# Altium PCB vp40_base_board.PcbDoc (part 3 of 5)
Units mil, origin at the board's own origin, x right, y up, seen from the top; angles counter-clockwise.
Board outline 8267.72 x 4330.71 mil, 4 copper layers (Top Layer, Internal Plane 1, Internal Plane 2, Bottom Layer), stack 30.635 mil thick; 531 components, 391 nets, 1969 pads, 1352 vias.
Unrouted connection lines stored in the file: 302.
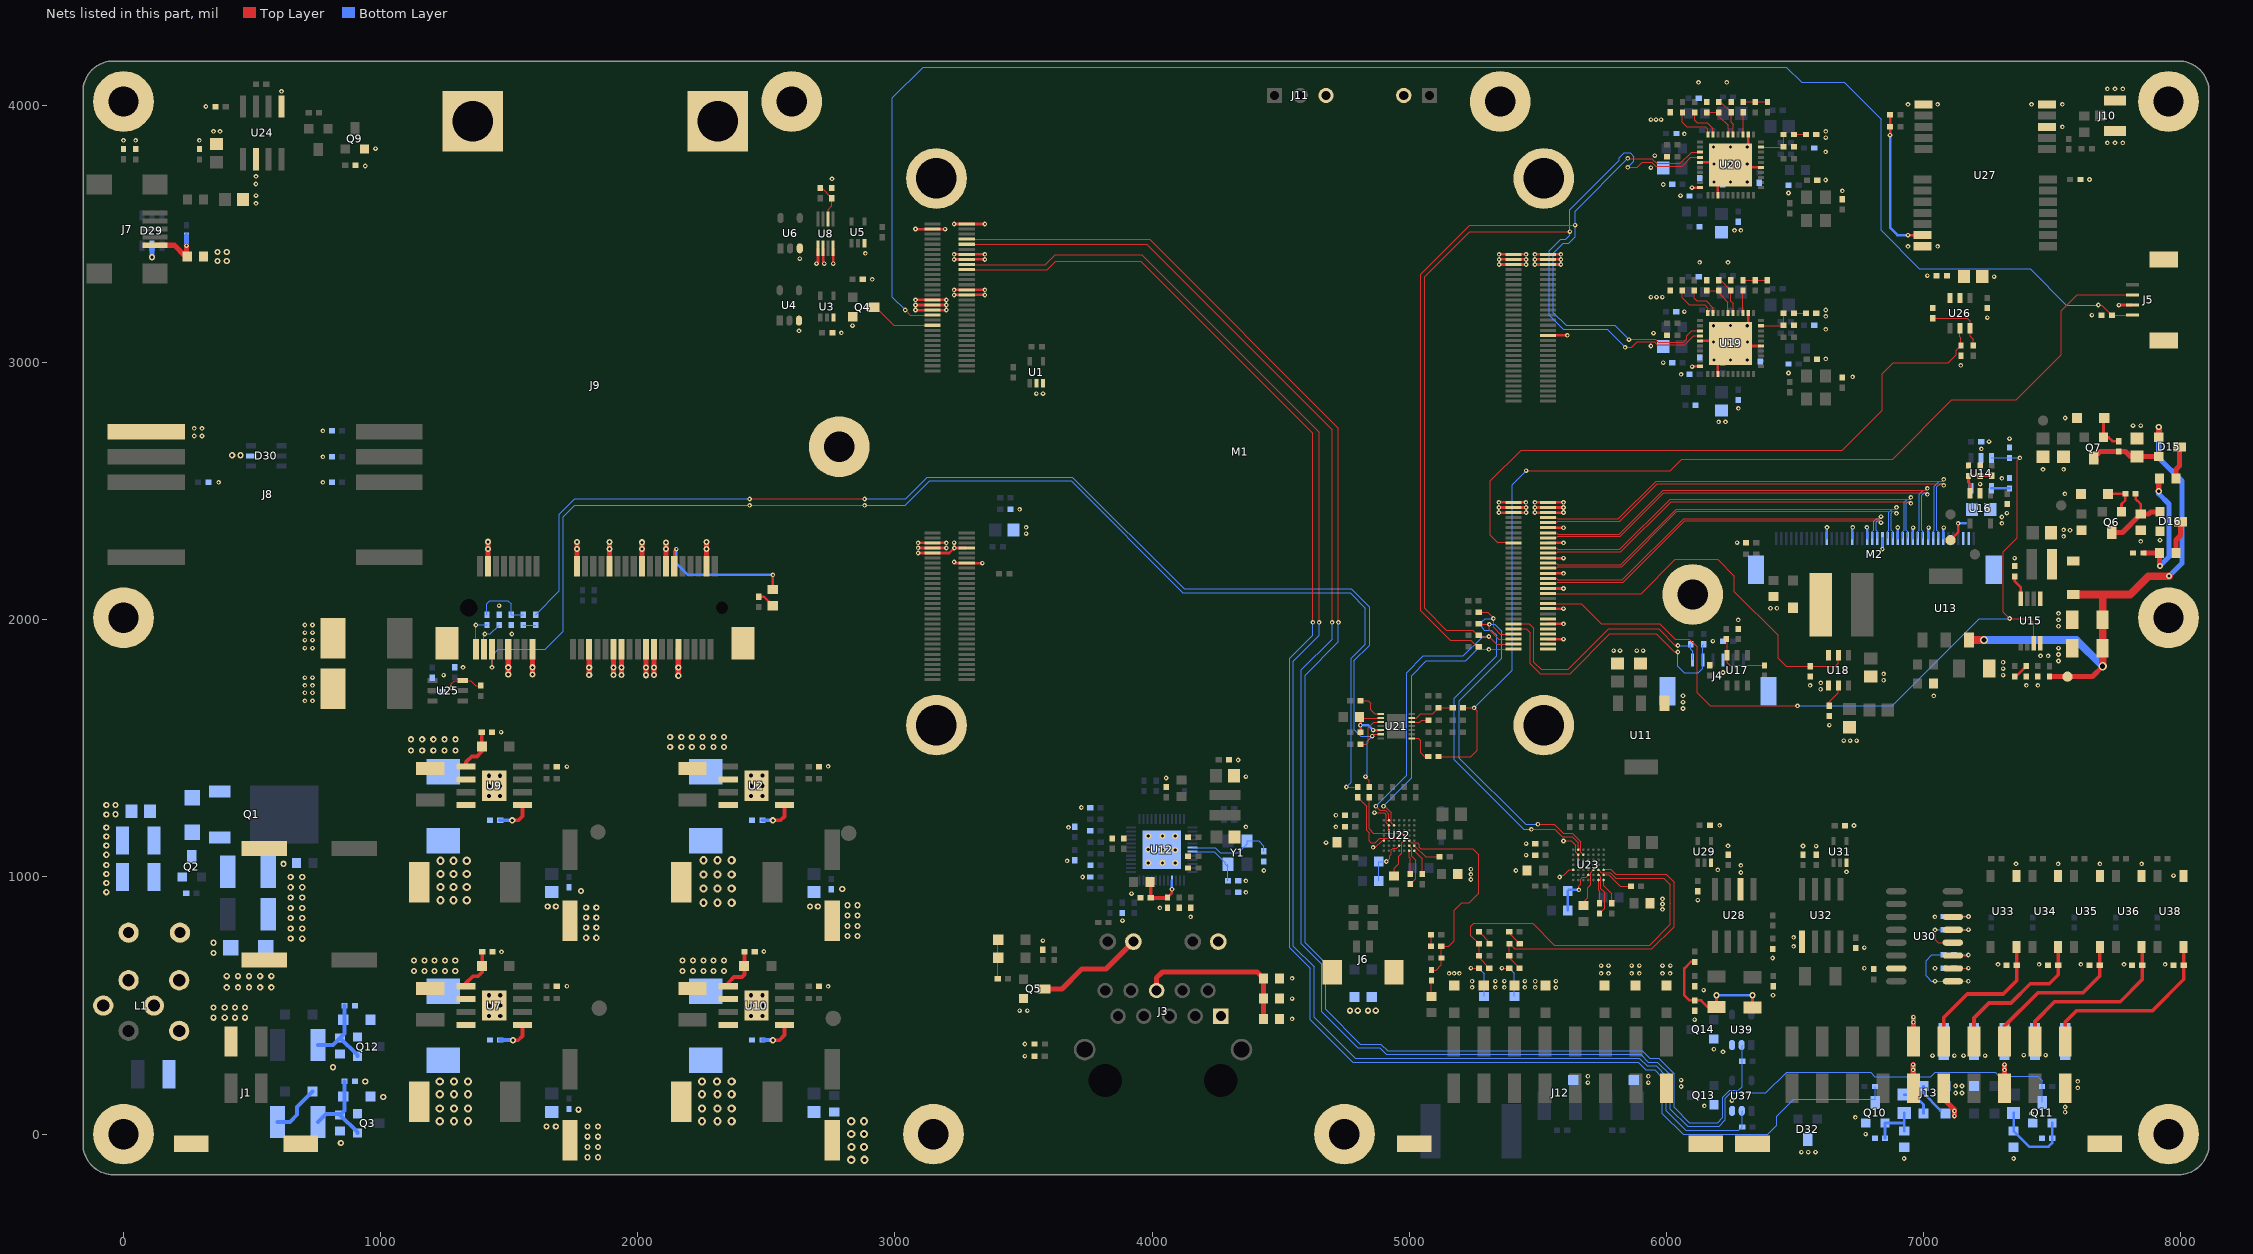
[diagram p5: the nets of this part, all layers, seen from the top]

## Via types
v1: diameter 18, hole 8, Top Layer to Bottom Layer, tented both sides, 481 vias
v2: diameter 18, hole 8, Top Layer to Bottom Layer, 376 vias
v3: diameter 32, hole 16, Top Layer to Bottom Layer, tented both sides, 202 vias
v4: diameter 24, hole 12, Top Layer to Bottom Layer, tented both sides, 182 vias
v5: diameter 24, hole 12, Top Layer to Bottom Layer, 65 vias
v6: diameter 32, hole 16, Top Layer to Bottom Layer, 34 vias
v7: diameter 32, hole 20, Top Layer to Bottom Layer, 7 vias
v8: diameter 32, hole 20, Top Layer to Bottom Layer, tented both sides, 3 vias
v9: diameter 35, hole 20, Top Layer to Bottom Layer, 2 vias

## Nets (pads, with @x,y where several pads share a name; then routed paths per layer and width w, separated by ;. In a path a pad name is that pad's centre, name@x,y a point inside that pad or via, vN(x,y) a via of type N, cw(c..) or ccw(c..) an arc to the next point about the centre after c; other vN are vias at no path point) (continued)
GND: C1.2 C2.2 C3.2 C4.2 C5.2 C6.2 C7.2 C8.2 C10.2 C11.1 C12.2 C13.1 C15.2 C16.2 C17.2 C18.1 C19.1 C22.2 C23.2 C24.1 C25.2 C26.1 C27.2 C28.1 C29.1 C30.2 C31.2 C32.2 C33.2 C34.2 C35.2 C36.2 C37.2 C38.2 C39.2 C40.2 C41.2 C42.2 C43.2 C44.2 C45.2 C46.2 C47.2 C48.2 C49.1 C50.2 C51.2 C52.1 C53.2 C54.2 C55.2 C58.2 C59.2 C60.2 C61.2 C62.2 C63.2 C64.2 C65.2 C66.2 C67.2 C68.2 C69.2 C71.2 C72.2 C73.2 C74.2 C75.2 C76.2 C77.2 C78.2 C79.2 C84.2 C85.2 C86.2 C90.1 C92.1 C93.1 C94.2 C99.1 C100.1 C101.1 C102.1 C103.1 C104.1 C105.2 C106.2 C107.2 C108.2 C109.2 C114.2 C115.2 C116.2 C120.1 C122.1 C123.1 C124.2 C129.1 C130.1 C131.1 C132.1 C133.1 C134.1 C141.1 C145.1 C148.1 C156.1 C162.1 C165.1 C170.1 C172.1 C173.2 C174.2 C176.2 C177.2 C178.2 C181.2 C182.2 C183.2 C184.2 C186.2 C187.2 C188.1 C189.2 C190.2 C191.2 C192.2 C193.2 C194.2 C196.2 C197.2 C199.2 C200.2 C201.1 C202.2 C203.2 C204.2 C205.2 C206.2 C207.2 C208.2 C209.2 C210.2 D3.2 D5.1 D6.1 D7.1 D9.1 D10.1 D16.2 D17.1 D18.2 D21.1 D22.1 D24.1 D25.1 D26.1 D27.1 D28.1 D29.2 D30.2 D32.3 D35.1 D36.1 D38.1 D39.1 D40.1 D42.1 D43.1 D44.1 D45.1 D46.1 D47.1 D48.1 J1. J1.1 J2.2 J3.1 J3.14 J4. J4.3 J5. J5.2 J6. J8.4 J9.4 J9.9 J9.15 J9.18 J9.21 J9.26 J9.27 J9.29 J9.34 J9.35 J9.37 J9.40 J9.43 J9.50 J9.@1257.87,1909.45 J9.@2409.45,1909.45 J9.MT17 J9.MT18 J10.2 J10.3 J11.3 J12. J12.16 J13. J13.9 J13.10 J13.16 J13.20 L1.2 L1.4 L1.5 L1.6 L24.1 L28.1 L30.1 M1.A5 M1.A11 M1.A17 M1.A25 M1.A31 M1.A37 M1.A43 M1.A49 M1.A55 M1.A56 M1.A57 M1.A58 M1.A59 M1.A60 M1.B27 M1.B55 M1.B56 M1.B57 M1.B58 M1.B59 M1.B60 M1.C47 M1.C52 M1.C53 M1.C54 M1.C56 M1.D26 M1.D28 M1.D30 M1.D31 M1.D33 M1.D45 M1.D47 M1.D58 M1.D59 M1.MT13 M1.MT14 M1.MT15 M1.MT16 M2. M2.7 M2.10 M2.13 M2.16 M2.19 M2.22 M2.25 M2.30 pad.MT1 pad.MT2 pad.MT3 pad.MT4 pad.MT5 pad.MT6 pad.MT7 pad.MT8 pad.MT9 pad.MT10 pad.MT11 pad.MT12 Q3.3 Q4.3 Q5.3 Q9.3 Q10.3 Q11.3 Q12.3 Q13.3 Q14.3 R3.1 R7.2 R9.2 R11.2 R12.2 R15.2 R16.2 R17.2 R18.2 R21.2 R22.2 R30.2 R41.2 R45.1 R50.1 R51.1 R52.1 R53.1 R54.1 R55.1 R56.1 R57.1 R64.2 R65.2 R66.1 R68.2 R70.1 R71.1 R73.1 R75.2 R76.2 R80.2 R84.2 R85.2 R89.2 R93.2 R94.2 R121.1 R123.2 R125.1 R127.1 R128.1 R130.1 R135.1 R136.1 R140.1 R146.2 R148.2 R153.2 R158.2 R163.2 U1.2 U1.3 U2.6 U2.9 U3.3 U4.3 U5.3 U6.3 U7.6 U7.9 U8.1 U8.2 U8.4 U9.6 U9.9 U10.6 U10.9 U11.1 U12.49 U14.2 U15.4 U16.2 U18.4 U19. U19.3 U19.15 U19.22 U19.35 U19.40 U20. U20.3 U20.15 U20.22 U20.35 U20.40 U22.F2 U22.F3 U22.G5 U23.F2 U23.F3 U23.G5 U24.1 U24.6 U27.10 U27.12 U27.13 U27.24 U28.2 U29.3 U30.15 U31.3 U32.5 U33.3 U34.3 U35.3 U36.3 U37.3 U38.3 U39.3 | length 6805.5
  Top Layer w3: 4911.07,1240 4911.07,1210.98 U22.F2@4921.26,1200.79 ; 5647.29,1122.71 5647.29,1096.8 U23.F2@5657.48,1086.61
  Top Layer w4.7: v1(4860,1115) 4868.49,1115 4895.22,1141.73 U22.G5@4901.57,1141.73 ; v1(4865,1250) 4866.05,1248.95 4902.12,1248.95 4911.07,1240 ; U22.F3@4921.26,1181.11 U22.F2@4921.26,1200.79 ; v1(5585,1000) 5591.85,1006.85 5601.85,1006.85 5622.55,1027.55 U23.G5@5637.79,1027.55 ; v1(5600,1140) 5630,1140 5647.29,1122.71 ; U23.F3@5657.48,1066.93 U23.F2@5657.48,1086.61
  Top Layer w10: v1(2695,3385) 2700.79,3390.79 U8.1@2700.79,3444.88 ; U8.2@2720.47,3444.88 2720.47,3389.53 v1(2725,3385) ; U8.4@2759.84,3444.88 2759.84,3385 v1(2760,3385) ; v1(3080,3224.41) M1.D28@3145.67,3224.41 v1(3200,3224.41) ; v1(3080,3244.27) 3080.17,3244.1 M1.D30@3145.67,3244.1 v1(3200,3244.09) ; v1(3080,3520) 3080.31,3519.69 M1.D58@3145.67,3519.69 v1(3195,3519.69) ; v1(3080.17,3205) 3080.45,3204.73 M1.D26@3145.67,3204.73 3199.73,3204.73 v1(3200,3205) ; v1(3090,2299.21) M1.C56@3145.67,2299.21 v1(3199.73,2299.21) ; v1(3090.16,2260) 3090,2259.84 M1.C52@3145.67,2259.84 3211.25,2259.84 v2(3230.94,2279.53) ; v1(3090.16,2280) 3090.63,2279.53 M1.C54@3145.67,2279.53 v1(3199.73,2279.53) ; v1(3230,2225) 3234.53,2220.47 M1.C47@3279.53,2220.47 v1(3340,2220.47) ; v1(3230,2300) 3230.94,2299.06 v2(3230.94,2279.53) ; v1(3230,3263.31) 3230.47,3263.78 M1.D31@3279.53,3263.78 3349.53,3263.78 v1(3350,3263.31) ; v1(3230,3283.46) M1.D33@3279.53,3283.47 v1(3350,3283.46) ; v1(3230,3421.26) M1.D47@3279.53,3421.26 v1(3349.53,3421.26) ; v1(3230,3539.37) M1.D59@3279.53,3539.37 v1(3349.53,3539.37) ; v1(3230.47,3401.57) M1.D45@3279.53,3401.58 v1(3349.53,3401.57) ; M1.C53@3279.53,2279.53 v2(3230.94,2279.53) ; v2(5348.94,2417.32) M1.A56@5405.51,2417.32 v2(5455,2417.32) ; v2(5348.94,2437.01) M1.A58@5405.51,2437.01 v2(5455,2437.01) ; v2(5348.94,2456.69) M1.A60@5405.51,2456.69 v2(5453.94,2456.69) ; v1(5350,3381.89) M1.B56@5405.51,3381.89 v1(5455,3381.89) ; v1(5350,3401.57) M1.B58@5405.51,3401.57 v1(5455,3401.57) ; v1(5350,3421.26) M1.B60@5405.51,3421.26 v1(5455,3421.26) ; v2(5488.74,2417.32) M1.A55@5539.37,2417.32 v2(5600,2417.32) ; v2(5488.74,2437.01) M1.A57@5539.37,2437.01 v2(5600,2437.01) ; v2(5488.74,2456.69) M1.A59@5539.37,2456.69 v2(5600,2456.69) ; v1(5488.74,3381.89) M1.B55@5539.37,3381.89 v1(5590,3381.89) ; v1(5488.74,3401.57) M1.B57@5539.37,3401.57 v1(5590,3401.57) ; v1(5488.74,3421.26) M1.B59@5539.37,3421.26 v1(5590,3421.26) ; M1.A5@5539.37,1925.2 v2(5600,1925.2) ; M1.A11@5539.37,1984.25 v2(5600,1984.25) ; M1.A17@5539.37,2043.31 v2(5600,2043.31) ; M1.A25@5539.37,2122.05 v2(5600,2122.05) ; M1.A31@5539.37,2181.1 v2(5600,2181.1) ; M1.A37@5539.37,2240.16 v2(5600,2240.16) ; M1.A43@5539.37,2299.21 v2(5600,2299.21) ; M1.A49@5539.37,2358.27 v2(5600,2358.27) ; M1.B27@5539.37,3106.3 v1(5615,3106.3) ; v1(6100,3680.83) U20.40@6131.57,3680.83 ; v1(6100.39,2985) 6101.61,2986.22 U19.40@6131.45,2986.22 ; U19.35@6131.45,3084.65 U19.@6239.72,3084.65 ; U20.35@6131.57,3779.26 U20.@6239.84,3779.26 ; U19.3@6200.35,2956.69 U19.@6200.35,3025.59 ; U20.3@6200.47,3651.31 U20.@6200.47,3720.2 ; U19.@6259.4,3064.96 U19.15@6367.67,3064.96 ; U20.@6259.53,3759.57 U20.15@6367.8,3759.57 ; U19.@6318.46,3143.7 U19.22@6318.46,3192.91 ; U20.@6318.58,3838.31 U20.22@6318.58,3887.53 ; v2(7760,3224.06) 7760.35,3224.41 J5.2@7813.39,3224.41
  Top Layer w20: J9.4@1417.32,2208.66 v5(1417.32,2303.5) ; v5(1496.06,1787.4) J9.9@1496.06,1885.83 ; v5(1590,1787.4) 1590.55,1787.95 J9.15@1590.55,1885.83 ; J9.18@1763.78,2208.66 v5(1763.78,2302.28) ; v5(1811.02,1786.02) J9.21@1811.02,1885.83 ; J9.26@1889.76,2208.66 v5(1889.76,2302.28) ; v5(1905.51,1785) J9.27@1905.51,1885.83 ; v5(1937.01,1785.28) J9.29@1937.01,1885.83 ; J9.34@2015.75,2208.66 v5(2015.75,2301.54) ; v5(2031.5,1784.77) J9.35@2031.5,1885.83 ; v5(2062.99,1785.03) J9.37@2062.99,1885.83 ; J9.40@2110.24,2208.66 v5(2110.24,2301.3) ; v5(2157.48,1782.65) J9.43@2157.48,1885.83 ; J9.50@2267.72,2208.66 v5(2267.72,2302.28) ; v2(6960,270) 6960,178.98 J13.10@6960.63,178.35 ; J13.9@6960.63,360.24 v2(6960.63,455) ; J13.16@7314.96,178.35 v2(7314.96,270)
  Bottom Layer w4.7: v1@4857.3,1117.3 4859.6,1115 v1(4860,1115)
  Bottom Layer w10: M2.30@6624.02,2316.54 6624.02,2359.02 v1(6625,2360) ; M2.25@6722.44,2316.54 6722.44,2357.44 v1(6725,2360) ; v1(6780,2360) 6781.5,2358.5 M2.22@6781.5,2316.54 ; v1(6840,2275) 6840.55,2275.55 M2.19@6840.55,2316.54 ; M2.16@6899.61,2316.54 6899.61,2358.62 v1(6900,2359.02) ; M2.13@6958.66,2316.54 6958.66,2357.17 v1(6960,2358.5) ; M2.10@7017.72,2316.54 7017.72,2356.22 v1(7020,2358.5) ; M2.7@7076.77,2316.54 7076.77,2356.54 v1(7078.74,2358.5)
  Bottom Layer w20: v5(110.63,3410) D29.2@110.63,3455
  other v1: 3505,303.15 3505,350.39 4545,448.07 3485,480 3515,480 4545,526.81 5245,570.87 5335,570.87 5370,570.87 5450,570.87 1724.41,575 2740.16,574.8 5245,594.49 5335,595 5370,595 5450,595 4545,605.55 5155,625 5175,625 5195,625 1470,708.66 2490,710 3575,752.16 3885,830 4150,845 5985,874.02 4030,880 5985,895 5985,915 3920,935 4365,940 4365,985 5240,990 3730,1000 5240,1010 4435,1025 5415,1025 5240,1030 3670,1062.99 5455,1085 5455,1129.92 4676.38,1133.86 3675,1192.91 4365,1195 4715,1195 4715,1240.16 3725,1270 4055,1385 4365,1390 1724.41,1429.13 2740.16,1430 4335,1455 6690,1530 6715,1530 6740,1530 1468.5,1562.99 6633.86,1590.55 6065,1655 6065,1680 6065,1704.72 7040,1704.28 6600,1730 6559.06,1745 7400,1745 7445,1745 6600.39,1755 6845,1765 7310,1785 6845,1790 7310,1810 7310,1835 7525,1840 7455,1860 7485,1860 7525,1865 5795,1880 5820,1880 5885,1880 5910,1880 7525,1890 7525,1975 7525,2000 7525,2025 6405,2045 6430,2045 7354.33,2240.16 6275.15,2300 7845,2305 7920,2310 7545,2325 3510,2335 7570,2348.5 7545,2350 3510,2360 7305,2375 7305,2400 7324.4,2415 7550,2490 7220.47,2527.56 7305,2550 7465,2585 7545,2585 7225,2665 7255,2692.91 7334.65,2705 7815,2755 7845,2755 6203.59,2770 6230,2770 7551.18,2785 6280,2822.25 6057.43,2955 6475,2960 7145,2990 5987.87,3000 6620,3015 5940,3064.96 5950,3115 2791.86,3116.34 2626.78,3124.09 6620,3130 2835,3144.09 7248.15,3175 6620,3180 6070,3198.31 6620,3205 2911.86,3324.09 7275,3335 7015,3338.58 6129.48,3390 6240,3390 2629.92,3405 2885,3425 6940,3452.76 7055,3452.76 6265,3515 6290,3515 6055,3650 6475,3660 6684.72,3668.2 5987.87,3693.08 6619.76,3710.36 7645.48,3712.6 2755,3715 5940,3758.87 5955,3805 6619.64,3820 7715,3855 7745,3855 7775,3855 6620,3875 6070,3890 6620,3900 7540,3917.32 5960,3945 5980,3945 6940,4005 7055,4005 7420,4005 7540,4005 7715,4065 7745,4065 7775,4065 6125,4090 6235,4090
  other v2: 6925,-95 7350.39,-95 6525,-70 6551.81,-70 6580,-70 6775,0 6735,65 7420,80 7551.18,85 7551.18,105.59 6147.65,110 6255,130 7125,160 7150,160 7600,180 6057.43,185.04 7125,187.01 7150,187.01 5695,200 5930,200 7600,205 6057.43,210 5695,225 5930,225 6960,250 7315,250 7035,305 7120,305 7155.51,305 7240,305 7390,307.09 7475,307.09 6220.47,320 6185,330 6960.63,435 6110,445 6415,540 6145,560 5570,570 5490.13,570.68 5490.13,594.49 5570,595 5746.4,625 5775,625 5865,625 5895,625 5985,625 6015,625 6770,645 7045,645 5746.4,655 5775,655 5865,655 5895,655 5985,655 6015.43,655 7290,660 7450,660 7611.85,660 7780,660 7940,660 6413.39,685 6770,725 6495,730 6495,765 7044.49,845 6122.05,910 7972.25,1005 6290,1017.36 6700.8,1019.91 6200,1027.55 6289.81,1045 7360,1051.18 7523.43,1051.18 7685.94,1051.18 7848.23,1051.18 6582.8,1120 6239.72,1121.22 6531.5,1120.56 6730,1200 6207.57,1200.79 705,1685.04 735,1685.04 705,1716.54 735,1716.54 705,1745.28 735,1745.28 705,1775.28 735,1775.28 1245,1785 6220.47,1795 1320,1815 705,1889.76 735,1889.76 6181.1,1917.32 705,1921.26 735,1921.26 1510,1945 705,1950 735,1950 705,1980 735,1980 6279.53,2000 1460.63,2055 3485,2430 370,2535 775,2535 775,2633.86 275,2715 305,2715 775,2735 275,2745 305,2745 3550,2880 3575.62,2880 6724.41,2945 7655,3185 5940,3255 5961.88,3255 5984.69,3255 515.31,3620 515,3650 514.37,3695 515.31,3725 940,3765 980,3832.41 0,3865 47.24,3865 295,3865 350,3900 375,3900 5940,3945 320,3996.25 614.37,4055.12
  other v3: 2830,-100 2881.9,-100 2830.71,-50 2880,-50 2830,0 2880,0 2830,50 2880,50 1421.26,458.66 1465,460 2440,460 2485,460 1421.26,500 1465,500 2440,500 2485,500 1421.26,540 1465,540 2440,540 2485,540 1421.26,1314.96 1464.57,1314.96 2440,1315 2485,1315 1421.26,1354.33 1464.57,1354.33 2440,1355 2485,1355 1421.26,1393.7 1464.57,1393.7 2440,1395 2485,1395
  other v4: 1805,-90 1845,-90 1805,-50 1845,-50 845,-35 1805,-10 1845,-10 1645,30 1681.1,30 1805,30 1845,30 1770,95 1010,145 940,205 815,260 350.39,452.76 393.7,452.76 433.07,452.76 472.44,452.76 4770,480 4800,480 4840,480 4870,480 350.39,492.13 393.7,492.13 433.07,492.13 472.44,492.13 401.57,570.87 444.88,570.87 488.19,570.87 531.5,570.87 574.8,570.87 401.57,614.17 444.88,614.17 488.19,614.17 531.5,614.17 574.8,614.17 1130,635 1170,635 1210,635 1250,635 1290,635 2173.23,635 2215,635 2255,635 2295,635 2335,635 1130,675 1170,675 1210,675 1250,675 1290,675 2173.23,675 2215,675 2255,675 2295,675 2335,675 350.39,704.72 350.39,744.09 695,760 650,760.28 1799.21,763.78 1838.58,763.78 2815,770 2855,770 650,800 695,800 1799.21,803.15 1838.58,803.15 2815,810 2855,810 650,840 695,840 1799.21,842.96 1838.58,842.52 2815,850 2855,850 650,880 695,880 1799.21,881.89 1838.58,881.89 1649.61,885.83 1681.1,885.83 2670,885.83 2700,885.83 2815,890 2855,890 650,920 695,920 -66.93,940.94 1779.53,944.88 2795,952.76 650,960 695,960 -66.93,976.38 650,1000 695,1000 -66.93,1011.82 -66.93,1047.24 622.05,1051.18 3985,1055.12 4040,1055.12 4090,1055 -66.93,1086.62 4090,1105 3985,1106.3 4040,1106.3 -66.93,1122.05 -66.93,1157.48 3985,1160 4040,1160 4090,1160 -66.93,1192.91 -66.93,1242.54 -31.5,1244.09 -66.93,1279.53 -31.5,1279.53 1118.11,1492.13 1161.42,1492.13 1204.72,1492.13 1248.03,1492.13 1291.34,1492.13 2125.98,1505 2169.29,1505 2210,1505 2251.97,1505 2295,1505 2335,1505 1118.11,1535.43 1161.42,1535.43 1204.72,1535.43 1248.03,1535.43 1291.34,1535.43 2125.98,1545 2169.29,1545 2210,1545 2251.97,1545 2295,1545 2335,1545 6185,3010 6249.56,3010 6314.69,3010 6183.84,3080 6250,3080 6315,3080 6183.84,3143.7 6314.69,3143.7 6250,3145 6184.72,3703.2 6249.64,3703.2 6314.69,3703.2 6184.69,3773.2 6249.69,3773.2 6314.69,3773.2 6183.84,3838.2 6249.69,3838.2 6314.69,3838.2
  other v5: 1811.02,1815 1905.51,1815 1937.01,1815 2031.5,1815 2062.99,1815 2157.48,1815 1496.06,1815.4 1590,1815.4 1417.32,2275 1763.78,2275 1890,2275 2015.75,2275 2110,2275 2267.72,2275 422.54,2640 455,2640 365,3395 401.57,3395 365,3430 401.57,3430
GPS-PWR: C185.1 C186.1 C187.1 R137.2 R138.2 U26.2 U26.3 U27.23 | length 577.7
  Top Layer w10: v2(6870,3885) R138.2@6870.01,3917.32 ; R138.2@6870.01,3917.32 R137.2@6870.01,3964.57 ; v2(6940,3496.06) U27.23@6996.18,3496.06
  Bottom Layer w10: v2(6870,3885) 6870,3525 6898.94,3496.06 v2(6940,3496.06)
GPS-PWREN: M1.A44 R136.2 U26.5 | length 2525.5
  Top Layer w4.7: M1.A44@5405.51,2299.21 5345,2299.21 5315,2329.21 5315,2540 5435,2660 6685,2660 6840,2815 6840,2957.48 6882.52,3000 7097.13,3000 7127.94,3030.81 7127.94,3049.27 R136.2@7145.79,3067.12 7145.79,3096.06 7141.85,3100 U26.5@7141.85,3133.86
I2C1-SCL: M1.A4 R24.1 U19.34 U20.34 U22.F1 | length 5198.8
  Top Layer w4.7: v2(4870,1275) 4886.35,1258.65 4906.14,1258.65 4921.06,1243.73 4921.06,1220.68 U22.F1@4921.26,1220.48 ; M1.A4@5405.51,1905.51 5340,1905.51 5310.43,1935.08 v2(5310,1935.08) 5271.65,1935.08 5246.73,1960 5145,1960 5060,2045 5060,3335 5235,3510 v2(5625,3510) ; v2(5840,3060) 5866.34,3060 5887.65,3081.31 5953.69,3081.31 5965,3070 6072,3070 6106.33,3104.33 U19.34@6131.45,3104.33 ; v2(5850,3760) 5886.34,3760 5906.34,3780 5943.16,3780 5958.16,3765 6061.8,3765 6095.74,3798.94 U20.34@6131.57,3798.94
  Bottom Layer w4.7: v2(4870,1275) 4990,1395 4990,1795 5055,1860 5210,1860 5285.08,1935.08 v2(5310,1935.08) ; v2(5840,3060) 5770,3130 5600,3130 5545,3185 5545,3435 5590,3480 5608.62,3480 5625,3496.38 v2(5625,3510) 5625,3595.2 5816.5,3786.7 5816.5,3796.5 5836,3816 5859,3816 5873.15,3801.85 5873.15,3783.15 v2(5850,3760)
I2C1-SDA: M1.A2 R23.1 U19.33 U20.33 U22.E2 | length 5085.8
  Top Layer w3: 4930.76,1239.24 4930.76,1210.97 U22.E2@4940.94,1200.79
  Top Layer w4.7: v2(4900,1275) 4904.81,1275 4930.76,1249.04 4930.76,1239.24 ; M1.A2@5405.51,1885.83 5273.66,1885.83 5239.49,1920 5159.88,1920 5045,2034.88 5045,3345 5235,3535 v2(5645,3535) ; v2(5850,3795) 5851.22,3793.78 5943.1,3793.78 5961.88,3775 6055,3775 6098.63,3818.63 U20.33@6131.57,3818.63 ; v2(5855,3090) 5856.01,3091.01 5957.71,3091.01 5968.72,3080 6066.37,3080 6079.69,3093.32 6079.69,3104.69 6099.02,3124.02 U19.33@6131.45,3124.02
  Bottom Layer w4.7: v2(4900,1275) 5010,1385 5010,1782.91 5067.09,1840 5220,1840 5265,1885 v2(5310,1885) ; v2(5850,3795) 5645,3590 v2(5645,3535) 5645,3490 5620,3465 5599.37,3465 5560,3425.63 5560,3195 5610,3145 5800,3145 v2(5855,3090)
I2C2-SCL: J4.6 M1.A12 R28.1 | length 998.2
  Top Layer w4.7: M1.A12@5405.51,1984.25 5467.37,1984.25 5485,1966.63 5485,1835 5512.91,1807.09 5618.18,1807.09 5776.09,1965 5970,1965 6035,1900 v2(6045,1900)
  Bottom Layer w4.7: v2(6045,1900) 6090.13,1900 R28.1@6095,1904.87 6095,1885 6102.36,1877.64 J4.6@6102.36,1844.09
I2C2-SDA: J4.5 M1.A10 R27.1 | length 1138.9
  Top Layer w4.7: M1.A10@5405.51,1964.57 5455.56,1964.57 5470.13,1950 5470.13,1829.87 5510,1790 5625.66,1790 5780.66,1945 5960,1945 6030,1875 v2(6045,1875)
  Bottom Layer w4.7: v2(6045,1875) 6045,1820 6070,1795 6125,1795 6141.73,1811.73 J4.5@6141.73,1844.09 6141.73,1901.61 R27.1@6145,1904.87
I2C3-SCL: M1.A8 R26.1 U23.F1 | length 1526.6
  Top Layer w4.7: R26.1@5271.65,2029.57 5305,2029.57 5328.26,2006.31 5328.26,1971.63 5355,1944.88 M1.A8@5405.51,1944.88 ; v2(5475,1185) 5566.35,1185 5595,1156.35 5633.65,1156.35 5656.99,1133.01 5656.99,1120.56 5657.48,1120.07 U23.F1@5657.48,1106.3
  Bottom Layer w4.7: v2(5327.52,2005) 5295,2005 5283.66,1993.66 5283.66,1968.66 5292.32,1960 5320,1960 5340,1940 5340,1860 5175,1695 5175,1455 5445,1185 v2(5475,1185)
I2C3-SDA: M1.A6 R25.1 U23.E2 | length 1450.8
  Top Layer w3: 5667.66,1125 5667.66,1096.11 U23.E2@5677.16,1086.61
  Top Layer w4.7: R25.1@5271.65,1982.32 v2(5311.91,1982.32) 5311.91,1962.23 5348.94,1925.2 M1.A6@5405.51,1925.2 ; v2(5500,1205) 5565,1205 5600,1170 5633.72,1170 5667.66,1136.06 5667.66,1125
  Bottom Layer w4.7: v2(5311.91,1982.32) 5332.68,1982.32 5360,1955 5360,1850 5195,1685 5195,1462.54 5452.54,1205 v2(5500,1205)
IO1: M1.D41 Q10.1 R149.2 | length 6577.7
  Top Layer w4.7: M1.D41@3279.53,3362.21 3592.21,3362.21 3625,3395 3955,3395 4625,2725 v2(4625,1990)
  Bottom Layer w4.7: v2(4625,1990) 4625,1940 4535,1850 4535,725 4615,645 4615,445 4780,280 5890,280 5919.4,250.6 5954.4,250.6 5985,220 5985,80 6065,0 6395,0 6430,35 6430,70 6495,135 6812.39,135 6812.39,183.86 R149.2@6811.21,185.04
IO2: M1.D51 Q11.1 R154.2 | length 7378.9
  Top Layer w4.7: M1.D51@3279.53,3460.63 3979.37,3460.63 4700,2740 v2(4700,1990)
  Bottom Layer w4.7: v2(4700,1990) 4700,1925 4580,1805 4580,740 4660,660 4660,475 4800,335 4885,335 4910,310 5900,310 5930,280 5965,280 6015,230 6015,97.26 6082.26,30 6205,30 6230,55 6230,140 6250,160 6387.5,160 6467.5,240 6795,240 6810.98,224.02 7029.02,224.02 7045,240 7278.35,240 7293.35,225 7445,225 7462,208 Q11.1@7462,123.31
IO3: M1.D43 R166.2 U37.2 | length 6017
  Top Layer w4.7: M1.D43@3279.53,3381.89 3585.32,3381.89 3623.43,3420 3960,3420 4650,2730 v2(4650,1990)
  Bottom Layer w4.7: v2(4650,1990) 4650,1939.76 4550,1839.76 4550,730 4630,650 4630,455 4790,295 5895,295 5925,265 5960,265 6000,225 6000,90 6075,15 6282.53,15 R166.2@6295.09,27.56 6295.09,88.77 U37.2@6293.31,90.55
IO4: M1.D53 R169.2 U39.2 | length 6242.4
  Top Layer w4.7: M1.D53@3279.53,3480.32 3990.16,3480.32 4725,2745.47 v2(4725,1990)
  Bottom Layer w4.7: v2(4725,1990) 4725,1914.77 4595,1784.77 4595,745 4675,665 4675,485 4810,350 4890,350 4916.28,323.72 5906.28,323.72 5935,295 5970,295 6030,235 6030,105 6090,45 6200,45 6220.3,65.3 6220.3,144.02 6245.98,169.7 6280,169.7 6295.09,184.79 R169.2@6295.09,283.46 6295.09,344.24 U39.2@6292.87,346.46
JTAG-TCK: M1.A13
JTAG-TDI: M1.A9
JTAG-TDO: M1.A7
JTAG-TMS: M1.A1
JTAG-TRST: M1.A3
LCD-2V5: C59.1 M2.2 M2.3 pad.@7105,2310 U14.5 | length 107.4
  Top Layer w10: pad.@7105,2310 7135,2340 v1(7135,2375)
  Bottom Layer w10: v1(7135,2375) 7165,2375
LCD-BL-PWM: M1.A23 R75.1 U18.2 | length 1480.8
  Top Layer w3.82: M1.A23@5539.37,2102.36 5901.54,2102.36 6034.17,2235 6200.35,2235 6265,2170.35 6265,2110 6435,1940 6435,1850 6465.66,1819.34 R75.1@6559.06,1819.34 6657.04,1819.34 6669.29,1831.59 U18.2@6669.29,1862.2
LCD-PWR-EN: M1.A19 R66.2 U14.3 U15.3 | length 3158.8
  Top Layer w4.7: M1.A19@5539.37,2062.99 5669.25,2062.99 5747.24,1985 5975.2,1985 6035.2,1925 6090,1925 6120,1895 6120,1716.47 6171.47,1665 6509.2,1665 v2(6510,1665.8) ; v1(7375,2630) 7365,2620 7365,2320 7309.92,2264.92 7309.92,2030.08 v2(7335,2005) 7410,2005 7429.13,1985.87 U15.3@7429.13,1909.45
  Bottom Layer w4.7: v2(6510,1665.8) 6510.8,1665 6877.7,1665 7217.7,2005 v2(7335,2005) ; U14.3@7263.78,2629.92 7263.97,2629.73 R66.2@7334.65,2629.73 7334.91,2630 v1(7375,2630)
LED-WWAN: D31.2 J9.42 | length 575.4
  Top Layer w10: J9.42@2141.73,2208.66 2141.73,2266.73 v2(2150,2275) ; D31.2@2525,2117.99 v2(2525,2175)
  Bottom Layer w10: v2(2150,2275) 2150,2220 2195,2175 v2(2525,2175)
LINK-LED: J3.12 Q5.1 | length 424
  Top Layer w20: Q5.1@3580,564.36 3649.36,564.36 3726.92,641.92 3820.66,641.92 J3.12@3927.56,748.82
LVDS0-CLK_N: M1.A33 M2.17 | length 1576.4
  Top Layer w3.82: M1.A33@5539.37,2200.79 5572.78,2200.79 5578.11,2206.12 5826.12,2206.12 6041.38,2421.38 6887.91,2421.38 v1(6895,2414.28)
  Bottom Layer w3.82: M2.17@6879.92,2316.54 6879.92,2344.04 6874.59,2349.37 6874.59,2414.59 6881.38,2421.38 6887.91,2421.38 v1(6895,2414.28)
LVDS0-CLK_P: M1.A35 M2.18 | length 1591.3
  Top Layer w3.82: M1.A35@5539.37,2220.47 5572.78,2220.47 5578.11,2215.14 5822.39,2215.14 6037.64,2430.39 6887.91,2430.39 v1(6895,2437.48)
  Bottom Layer w3.82: M2.18@6860.24,2316.54 6860.24,2344.04 6865.57,2349.37 6865.57,2418.32 6877.64,2430.39 6887.91,2430.39 v1(6895,2437.48)
LVDS0-TX0_N: M1.A51 M2.8 | length 1844
  Top Layer w3.82: M1.A51@5539.37,2377.95 5572.78,2377.95 5578.11,2383.29 5820,2383.29 ; 5820,2385.83 5964.17,2530 7071.65,2530 v1(7078.74,2522.91)
  Bottom Layer w3.82: M2.8@7057.09,2316.54 7057.09,2344.04 7051.75,2349.37 7051.75,2516.75 7065,2530 7075,2530 7078.74,2526.26 v1(7078.74,2522.91)
LVDS0-TX0_P: M1.A53 M2.9 | length 1860.2
  Top Layer w3.82: M1.A53@5539.37,2397.64 5572.78,2397.64 5578.11,2392.3 5813.73,2392.3 ; 5813.62,2392.2 5813.73,2392.3 ; v1(7078.74,2546.11) 7071.65,2539.02 5960.44,2539.02 5813.73,2392.3
  Bottom Layer w3.82: M2.9@7037.4,2316.54 7037.4,2344.04 7042.74,2349.37 7042.74,2520.49 7061.27,2539.02 7075,2539.02 7078.74,2542.76 v1(7078.74,2546.11)
LVDS0-TX1_N: M1.A45 M2.11 | length 1751.6
  Top Layer w3.82: M1.A45@5539.37,2318.9 5572.78,2318.9 5578.11,2324.23 5820,2324.23 5990.77,2495 7007.91,2495 v1(7015,2487.91)
  Bottom Layer w3.82: M2.11@6998.03,2316.54 6998.03,2344.04 6992.7,2349.37 6992.7,2485 7002.7,2495 7007.91,2495 v1(7015,2487.91)
LVDS0-TX1_P: M1.A47 M2.12 | length 1766.5
  Top Layer w3.82: M1.A47@5539.37,2338.58 5572.78,2338.58 5578.11,2333.25 5816.27,2333.25 5987.03,2504.02 7007.91,2504.02 v1(7015,2511.11)
  Bottom Layer w3.82: M2.12@6978.35,2316.54 6978.35,2344.04 6983.68,2349.37 6983.68,2488.73 6998.96,2504.02 7007.91,2504.02 v1(7015,2511.11)
LVDS0-TX2_N: M1.A39 M2.14 | length 1662.8
  Top Layer w3.82: M1.A39@5539.37,2259.84 5572.78,2259.84 5578.11,2265.18 5823.37,2265.18 6018.19,2460 6943.54,2460 v1(6950.63,2452.91)
  Bottom Layer w3.82: M2.14@6938.98,2316.54 6938.98,2344.04 6933.64,2349.37 6933.64,2453.64 6940,2460 6950,2460 6950.63,2459.37 v1(6950.63,2452.91)
LVDS0-TX2_P: M1.A41 M2.15 | length 1677.7
  Top Layer w3.82: M1.A41@5539.37,2279.53 5572.78,2279.53 5578.11,2274.19 5819.63,2274.19 6014.45,2469.02 6943.54,2469.02 v1(6950.63,2476.11)
  Bottom Layer w3.82: M2.15@6919.29,2316.54 6919.29,2344.04 6924.63,2349.37 6924.63,2457.38 6936.27,2469.02 6950,2469.02 6950.63,2469.65 v1(6950.63,2476.11)
LVDS0-TX3_N: M1.A27 M2.20 | length 1490.5
  Top Layer w3.82: M1.A27@5539.37,2141.73 5572.78,2141.73 5578.11,2147.07 5832.87,2147.07 6070.81,2385 6827.91,2385 v1(6835,2377.91)
  Bottom Layer w3.82: M2.20@6820.87,2316.54 6820.87,2344.04 6815.53,2349.37 6815.53,2379.67 6820.87,2385 6830,2385 6835,2380 v1(6835,2377.91)
LVDS0-TX3_P: M1.A29 M2.21 | length 1505.4
  Top Layer w3.82: M1.A29@5539.37,2161.42 5572.78,2161.42 5578.11,2156.08 5829.14,2156.08 6067.07,2394.02 6827.91,2394.02 v1(6835,2401.11)
  Bottom Layer w3.82: M2.21@6801.18,2316.54 6801.18,2344.04 6806.52,2349.37 6806.52,2383.4 6817.13,2394.02 6830,2394.02 6835,2399.02 v1(6835,2401.11)
MIC-AUD: C149.2 C179.2 U21.6 | length 4694.8
  Top Layer w4.7: v2(2435,2470) v2(2881.9,2470) ; v2(4830,1390) 4845,1375 C149.2@4845,1349.87 C149.2@4840,1354.87 ; v1(4856.35,1547.6) 4855,1546.25 4855,1545 4864.52,1554.52 4889.76,1554.52 U21.6@4889.76,1555.12
  Bottom Layer w4.7: C179.2@1602.36,2019.87 1695,2112.51 1695,2410 1755,2470 v2(2435,2470) ; v2(2881.9,2470) 3041.35,2470 3126.35,2555 3690,2555 4125,2120 4775.13,2120 4845,2050.13 4845,1900 4785,1840 4785,1574.87 4812.28,1547.6 v1(4856.35,1547.6) 4837,1528.25 4837,1397 v2(4830,1390)
MICBIAS: R97.2 R98.2 U21.13 | length 175.6
  Top Layer w4.7: U21.13@5009.84,1618.12 5028.12,1618.12 5045,1635 5091.88,1635 R97.2@5114.36,1657.48 R98.2@5169.1,1657.48
MR: C202.1 J5.1 M1.D24 | length 6486.1
  Top Layer w4.7: v2(3040,3205) 3060,3185 M1.D24@3145.67,3185.04 M1.D24@3145.67,3185.04 ; v2(7680,3224.41) 7693.35,3224.41 C202.1@7732.72,3185.04 J5.1@7813.39,3185.04
  Bottom Layer w4.7: v2(3040,3205) 2990,3255 2990,4030 3110,4150 6466.54,4150 6526.54,4090 6692.26,4090 6835,3947.26 6835,3514.29 6984.29,3365 7415,3365 7555.59,3224.41 v2(7680,3224.41)
MX6-ONOFF: M1.D20 Q4.1 | length 261.4
  Top Layer w4.7: Q4.1@2916.81,3214.76 Q4.1@2915.44,3216.13 2925.17,3216.13 2995.63,3145.67 M1.D20@3145.67,3145.67
NetC2_1: C2.1 C3.1 C4.1 D1.2 D2.1 Q1.2 Q2.3 R1.2
NetC8_1: C8.1 D5.2 Q3.2 R6.1 R9.1 | length 334
  Bottom Layer w15: R6.1@755.91,47.24 787.6,78.94 846.65,78.94 859.87,92.16 R9.1@859.87,205 ; C8.1@842.52,74.8 909.45,7.87 Q3.2@909.45,3.94
NetC9_1: C9.1 D6.2 L2.1 U2.8
  other v3: 2255,900 2310,900 2365,900 2255,955 2310,955 2365,955 2255,1010 2310,1010 2365,1010 2255,1065 2310,1065 2365,1065
NetC9_2: C9.2 U2.1 | length 136.5
  Top Layer w15: v4(2525,1220.48) 2555.48,1220.48 2570.87,1235.87 U2.1@2570.87,1279.53
  Bottom Layer w15: C9.2@2484.44,1220.47 v4(2525,1220.48)
NetC14_1: C14.1 D7.2 L3.1 U7.8
  other v3: 1230,50 1285,50 1340,50 1230,100 1285,100 1340,100 1230,155 1285,155 1340,155 1230,205 1285,205 1340,205
NetC14_2: C14.2 U7.1 | length 137.6
  Top Layer w15: v4(1515,365) 1535,365 1551.18,381.18 U7.1@1551.18,425.2
  Bottom Layer w15: C14.2@1464.76,366.14 1513.86,366.14 v4(1515,365)
NetC16_1: C16.1 R14.2 U8.6 | length 148.6
  Top Layer w4.7: R14.2@2710,3679.87 2715.13,3679.87 2755,3640 C16.1@2755,3639.87 2755,3610 2740.16,3595.16 U8.6@2740.16,3559.06
NetC20_1: C20.1 D10.2 L5.1 U10.8
  other v3: 2250,50 2310,50 2365,50 2250,100 2310,100 2365,100 2250,155 2310,155 2365,155 2250,205 2308.46,205 2365,205
NetC20_2: C20.2 U10.1 | length 135.4
  Top Layer w15: v4(2525,365) 2550.87,365 2570.87,385 U10.1@2570.87,425.2
  Bottom Layer w15: C20.2@2484.44,366.14 2523.86,366.14 v4(2525,365)
NetC21_1: C21.1 D9.2 L4.1 U9.8
  other v3: 1232.28,909.45 1283.46,909.45 1334.65,909.45 1232.28,960.63 1283.46,960.63 1334.65,960.63 1232.28,1012 1283.46,1012 1334.65,1012 1232.28,1062.99 1283.46,1062.99 1334.65,1062.99
NetC21_2: C21.2 U9.1 | length 132.3
  Top Layer w15: v4(1511.81,1220.48) 1535.44,1220.48 1551.18,1236.22 U9.1@1551.18,1279.53
  Bottom Layer w15: C21.2@1464.76,1220.47 v4@1507.87,1220.47
NetC36_1: C36.1 C37.1 L6.2 U12.16 | length 202.3
  Top Layer w10: C37.1@4060,920.13 4077.26,937.39 v1(4077.26,952.32)
  Top Layer w15: L6.2@3991.5,980 3995.13,976.37 C36.1@3995.13,920 3995.13,918.5 4058.37,918.5 C37.1@4060,920.13
  Bottom Layer w10: v1(4077.26,952.32) U12.16@4077.26,986.71
NetC46_1: C46.1 C47.1 C48.1 J3.6 | length 641.2
  Top Layer w20: J3.6@4017.72,558.66 4017.72,607.72 4040,630 4408.62,630 C46.1@4433.07,605.55 C47.1@4433.07,526.81 C48.1@4433.07,448.07
NetC50_1: C50.1 U12.6 Y1.1 | length 338.1
  Bottom Layer w4.7: U12.6@4157.48,1114.17 4245.83,1114.17 4265,1095 4335,1095 4370,1130 Y1.1@4370,1140 4415,1140 4435,1120 C50.1@4435,1100.13
NetC51_1: C51.1 U12.7 Y1.3 | length 229.6
  Bottom Layer w4.7: U12.7@4157.48,1098.43 4241.57,1098.43 4285.2,1054.8 4285.2,1049.44 Y1.3@4295,1039.64 ; C51.1@4294.87,985 4295.2,985.33 Y1.3@4295.2,1049.44
NetC53_1: C53.1 D15.2 Q7.1 R59.1 | length 285.7
  Top Layer w20: Q7.1@7672,2620 Q7.1@7662,2630 7686.87,2654.87 R59.1@7760,2654.87 7785.13,2654.87 7805,2635 C53.1@7830,2635 D15.2@7915,2635
NetC56_1: C56.1 C57.2 R60.1 | length 486.5
  Top Layer w20: R60.1@7855.13,2260 C56.1@7918.5,2260 7918.5,2211.5 v4(7920,2210) ; v4(7915,2500) 7915,2546.5 C57.2@7918.5,2550
  Bottom Layer w20: v4(7915,2500) 7915,2490 7955,2450 7955,2245 v4(7920,2210)
NetC56_2: C56.2 D16.3 | length 129.7
  Top Layer w20: C56.2@7981.5,2260 7981.5,2310 8000,2328.5 D16.3@8000,2382
NetC57_1: C57.1 D15.3 | length 128.4
  Top Layer w20: C57.1@7981.5,2550 7981.5,2585.11 7995,2598.61 D15.3@7995,2672 ; D15.3@7989.45,2678.54 D15.3@7990,2677.98
NetC58_1: C58.1 D16.1 Q6.1 R58.1 | length 307.9
  Top Layer w10: R58.1@7825.13,2490 7825.13,2469.87 7845,2450 C58.1@7845,2411.5
  Top Layer w20: Q6.1@7732,2340 7773.5,2340 C58.1@7845,2411.5 7875.12,2411.5 7883.62,2420 D16.1@7920,2420
NetC61_1: C61.1 C62.1 D15.1 D19.1 pad.@7560,1779.13 R61.1 U13.3 | length 2140.6
  Top Layer w20: R61.1@7490,1779.87 7657.39,1779.87 v8(7696.85,1819.34) ; D15.1@7915,2710 v4(7915,2750)
  Top Layer w30: U13.3@7177.17,1921.26 v8(7235,1921.26) ; D19.1@7582.68,2098.43 7696.85,2098.43 ; v8(7696.85,1819.34) C62.1@7696.85,1889.76 C61.1@7696.85,2000 7696.85,2098.43 ; v5(7955,2170) 7875,2170 7803.43,2098.43 7696.85,2098.43
  Bottom Layer w20: v4(7915,2750) 7915,2629.73 8005,2539.73 8005,2220 v5@7957.5,2172.5
  Bottom Layer w30: v8(7235,1921.26) 7594.93,1921.26 v8(7696.85,1819.34)
NetC65_1: C65.1 U14.4 | length 71
  Bottom Layer w10: U14.4@7263.78,2511.81 7264.22,2511.37 C65.1@7334.65,2511.37
NetC66_1: C66.1 R63.2 | length 61.6
  Top Layer w10: R63.2@7355,1780.13 7360,1780.13 C66.1@7400,1820.13
NetC67_1: C67.1 U15.8 | length 96
  Top Layer w10: C67.1@7354.33,2168.85 7354.33,2150.67 7377.95,2127.05 U15.8@7377.95,2082.68
NetC69_1: C69.1 R67.2 R68.1 U16.3 | length 160.3
  Top Layer w10: U16.3@7181.1,2492.13 7181.1,2528.9 7175,2535 R68.1@7175,2559.87 R67.2@7265,2559.87
NetC70_2: C70.2 R69.2 U17.6 | length 243.1
  Top Layer w4.7: R69.2@6232.28,1925.01 6236.03,1921.26 U17.6@6236.03,1862.2 6236.03,1833.78 6246.79,1823.02 C70.2@6381.89,1823.02
NetC74_1: C74.1 U18.5 | length 93
  Top Layer w3.82: C74.1@6633.86,1665.8 6633.86,1681.1 6669.29,1716.54 U18.5@6669.29,1744.09
NetC87_1: C87.1 U19.30 | length 163
  Top Layer w4.7: C87.1@6061.86,3280.55 6061.86,3253.14 6090,3225 6148.54,3225 6160.98,3212.57 U19.30@6160.98,3192.91
NetC88_1: C88.1 U19.29 | length 138.3
  Top Layer w4.7: C88.1@6109.1,3280.55 6109.1,3249.99 6118.94,3240.16 6154.84,3240.16 6180.66,3214.34 U19.29@6180.66,3192.91
NetC89_1: C89.1 R77.2 R78.1 | length 94.5
  Top Layer w4.7: C89.1@6298.08,3320.8 R78.1@6392.57,3320.8
NetC89_2: C89.2 U19.23 | length 88.2
  Top Layer w4.7: C89.2@6298.08,3280.8 6298.08,3193.6 U19.23@6298.77,3192.91
NetC90_2: C90.2 R82.2 | length 46.9
  Top Layer w4.7: R82.2@6495.81,3192.91 C90.2@6542.68,3192.91
NetC91_1: C91.1 C94.1 U19.26 | length 149.8
  Top Layer w4.7: C94.1@6156.35,3280.55 C91.1@6203.59,3280.55 6205,3279.14 6205,3270 6239.72,3235.28 U19.26@6239.72,3192.91
NetC91_2: C91.2 C92.2 U19.25 | length 155.1
  Top Layer w4.7: C91.2@6203.59,3320.55 6211.09,3320.55 C92.2@6250.84,3280.8 6250.84,3239.16 6259.4,3230.6 U19.25@6259.4,3192.91
NetC93_2: C93.2 R82.1 U19.19 | length 136.6
  Top Layer w4.7: U19.19@6367.67,3143.7 6454.09,3143.7 C93.2@6456.06,3145.67 6456.06,3192.66 R82.1@6455.81,3192.91
NetC117_1: C117.1 U20.29 | length 138.8
  Top Layer w4.7: C117.1@6109.92,3973.7 6109.92,3943.2 6119.92,3933.2 6159.69,3933.2 6180.79,3912.1 U20.29@6180.79,3887.53
NetC118_1: C118.1 U20.30 | length 168.8
  Top Layer w4.7: C118.1@6062.68,3973.7 6062.68,3935.21 6079.69,3918.2 6151.1,3918.2 6161.1,3908.2 U20.30@6161.1,3887.53
NetC119_1: C119.1 R86.1 R87.2 | length 94.5
  Top Layer w4.7: C119.1@6298.9,4013.95 R86.1@6393.39,4013.95
NetC119_2: C119.2 U20.23 | length 86.4
  Top Layer w4.7: U20.23@6298.9,3887.53 C119.2@6298.9,3973.95
NetC120_2: C120.2 R91.2 | length 46.9
  Top Layer w4.7: R91.2@6495.94,3887.53 C120.2@6542.8,3887.53
NetC121_1: C121.1 C124.1 U20.26 | length 148.1
  Top Layer w4.7: C124.1@6157.17,3973.7 C121.1@6204.41,3973.7 6204.41,3958.2 6239.84,3922.77 U20.26@6239.84,3887.53
NetC121_2: C121.2 C122.2 U20.25 | length 153.4
  Top Layer w4.7: C121.2@6204.41,4013.7 6211.91,4013.7 C122.2@6251.65,3973.95 6251.65,3935.64 6259.53,3927.76 U20.25@6259.53,3887.53
NetC123_2: C123.2 R91.1 U20.19 | length 136.6
  Top Layer w4.7: U20.19@6367.8,3838.31 6454.22,3838.31 C123.2@6456.19,3840.28 6456.19,3887.28 R91.1@6455.94,3887.53
NetC135_2: C135.2 L19.2 U21.2 U21.5 | length 222.1
  Top Layer w4.7: L19.2@4810.77,1617.92 4810.57,1618.12 U21.2@4889.76,1618.12
  Top Layer w10: C135.2@4810.77,1562.99 L19.2@4810.77,1617.92 ; v1(4860,1570.87) U21.5@4889.76,1570.87
  Bottom Layer w10: v1(4810,1590) 4840.87,1590 v1(4860,1570.87)
NetC136_1: C136.1 U21.12 | length 68.2
  Top Layer w4.7: U21.12@5009.84,1602.37 5040.17,1602.37 5048.04,1610.24 C136.1@5074.8,1610.24
NetC137_1: C137.1 U21.8 | length 121
  Top Layer w4.7: U21.8@5009.84,1539.38 5035.79,1539.38 5045,1530.17 5045,1483.89 5060.39,1468.5 C137.1@5074.36,1468.5
NetC137_2: C137.2 J5.3 R98.1 | length 4122.1
  Top Layer w4.7: C137.2@5114.36,1468.5 5240,1468.5 5265,1493.5 5265,1645 v2(5252.52,1657.48) R98.1@5209.1,1657.48 ; v2(5455,2580) 6015,2580 6060,2625 6880,2625 7110,2855 7360,2855 7535,3030 7535,3201.57 7597.2,3263.78 J5.3@7813.39,3263.78
  Bottom Layer w4.7: v2(5252.52,1657.48) 5400,1804.96 5400,2525 v2(5455,2580)
NetC138_1: C138.1 U21.3 | length 147.5
  Top Layer w4.7: C138.1@4811.02,1515.75 4831.61,1515.75 4840,1524.13 4840,1580.34 4862.03,1602.37 U21.3@4889.76,1602.37
NetC139_1: C139.1 U21.1 | length 115
  Top Layer w4.7: C139.1@4811.02,1685.04 4840.67,1685.04 4850.21,1675.5 4850.21,1649.79 4866.14,1633.86 U21.1@4889.76,1633.86
NetC142_1: C142.1 L20.1 | length 62.6
  Top Layer w4.7: L20.1@5086.61,535.43 C142.1@5086.61,597.98
NetC142_2: C142.2 C143.2 R102.1 U22.B5 | length 868
  Top Layer w3: U22.B5@5000,1141.73 5009.5,1132.23 5033.48,1132.23 5039.5,1126.21 5039.5,1115.67 5045.29,1109.87 5049.58,1109.87
  Top Layer w4.7: 5049.58,1109.87 5247.56,1109.87 5270,1087.43 5270,935.83 5234.17,900 5205,900 5175,870 5175,752.07 5152.93,730 C143.2@5124.87,730 5124.87,658.42 5104.44,637.98 C142.2@5086.61,637.98
NetC143_1: C143.1 R103.1 | length 45
  Top Layer w4.7: C143.1@5084.87,730 R103.1@5084.87,775
NetC146_2: C146.2 L21.2 U22.D6 | length 195.9
  Top Layer w3: 4925,1082.68 4930.76,1088.44 4930.76,1105.61 4937.46,1112.3 4952.3,1112.3 4960.63,1120.63 U22.D6@4960.63,1122.05
  Top Layer w4.7: v1(4911.07,1060) 4923.65,1072.58 4923.65,1081.33 4925,1082.68
  Bottom Layer w4.7: L21.2@4881.5,985 C146.2@4881.5,1060 v1(4911.07,1060)
NetC149_1: C149.1 U22.C4 | length 268.1
  Top Layer w3: 4875,1170.92 4970.82,1170.92 U22.C4@4980.32,1161.42
  Top Layer w4.7: C149.1@4843.65,1308.52 4843.65,1188.23 4860.96,1170.92 4875,1170.92
NetC150_1: C150.1 U22.D4 | length 319.4
  Top Layer w3: 4885,1151.23 4951.23,1151.23 4960.63,1160.63 U22.D4@4960.63,1161.42
  Top Layer w4.7: C150.1@4800,1309.87 4833.95,1275.92 4833.95,1181.05 4843.65,1171.35 4843.65,1140.21 4850.21,1133.65 4867.42,1133.65 4885,1151.23
NetC150_2: C150.2 J9.5 | length 5030.3
  Top Layer w4.7: v2(1433.07,1815) J9.5@1433.07,1885.83 ; v2(2435,2445) v2(2881.9,2445) ; v2(4755.54,1349.87) C150.2@4800,1349.87
  Bottom Layer w4.7: v2(1433.07,1815) 1433.07,1860 1458.07,1885 1639.61,1885 1710,1955.39 1710,2400 1755,2445 v2(2435,2445) ; v2(2881.9,2445) 3040,2445 3135,2540 3685,2540 4120,2105 4770,2105 4830,2045 4830,1904.87 4775,1849.87 4775,1369.33 v2(4755.54,1349.87)
NetC151_1: C151.1 U22.B7 | length 92.6
  Top Layer w4.7: U22.B7@5000,1102.36 5000,1076.84 5005,1071.84 5005,1013.32 C151.1@5003.94,1012.25
NetC151_2: C151.2 U22.B6 | length 168.8
  Top Layer w3: U22.B6@5000,1122.05 5009.75,1112.3 5009.75,1085
  Top Layer w4.7: C151.2@5003.94,972.25 5004.07,972.25 5024.83,993.01 5024.83,1065.73 5009.75,1080.81 5009.75,1085
NetC152_2: C152.2 U22.A6 | length 116.2
  Top Layer w4.7: U22.A6@5019.69,1122.05 5020.11,1122.05 5063.42,1078.74 C152.2@5117.93,1078.74
NetC153_2: C153.2 U22.A7 | length 103.4
  Top Layer w4.7: U22.A7@5019.69,1102.36 5051.18,1070.87 C153.2@5051.18,1012
NetC154_2: C154.2 U22.C5 | length 154.1
  Top Layer w3: 4958.65,1080.26 4970.82,1092.43 4970.82,1132.23 U22.C5@4980.32,1141.73
  Top Layer w4.7: C154.2@4940.94,1003.94 4940.94,1033.25 4958.65,1050.95 4958.65,1080.26
NetC157_1: C157.1 L25.1 | length 179.9
  Top Layer w4.7: v1(5240,645.67) C157.1@5271.21,645.67
  Bottom Layer w4.7: v1(5240,645.67) 5269.33,645.67 5291.34,623.66 L25.1@5291.34,535.43
NetC157_2: C157.2 C161.2 R111.1 U23.B5 | length 1499.8
  Top Layer w3: U23.B5@5736.22,1027.55 5746.4,1017.37 5759.84,1017.37 ; 5759.85,1017.36 5780,1017.36
  Top Layer w4.7: C157.2@5311.21,645.67 5271.65,685.23 R111.1@5271.65,692.91 5271.91,693.17 C161.2@5271.91,740.16 5240,772.06 5240,808.98 5251.02,820 5480,820 5565,735 5935,735 6015.43,815.43 6015.43,897.09 6015,896.65 6015,970 5990,995 5803.77,995 5781.42,1017.36 5780,1017.36
NetC158_1: C158.1 L26.1 | length 177.2
  Top Layer w4.7: v1(5360,645.67) C158.1@5389.32,645.67
  Bottom Layer w4.7: v1(5360,645.67) 5360.67,645 5390,645 5409.45,625.55 L26.1@5409.45,535.43
NetC158_2: C158.2 C160.2 R112.1 U23.A5 | length 1262.9
  Top Layer w4.7: C158.2@5429.32,645.67 5389.32,685.67 R112.1@5389.32,692.91 5389.57,693.17 C160.2@5389.57,740.16 5409.73,720 5942.87,720 6030,807.13 6030,980.32 5999.49,1010.83 5803.25,1010.83 5786.52,1027.55 U23.A5@5755.91,1027.55
NetC160_1: C160.1 R114.1 | length 63.9
  Top Layer w4.7: R114.1@5389.32,787.4 5389.32,780.41 C160.1@5429.57,740.16
NetC161_1: C161.1 R113.1 | length 63.9
  Top Layer w4.7: R113.1@5271.65,787.4 5311.91,747.15 C161.1@5311.91,740.16
NetC163_2: C163.2 L27.2 U23.D6 | length 202.2
  Top Layer w3: 5665,970 5667.66,972.66 5667.66,992.11 5673.91,998.37 5688.37,998.37 5696.85,1006.85 U23.D6@5696.85,1007.87
  Top Layer w4.7: v1(5660,950) 5660,965 5665,970
  Bottom Layer w10: L27.2@5616.5,870 C163.2@5616.5,945 5621.5,950 v1(5660,950)
NetC166_1: C166.1 U23.B7 | length 91.7
  Top Layer w4.7: U23.B7@5736.22,988.18 5736.22,948.43 5740.16,944.49 C166.1@5740.16,898.08
NetC166_2: C166.2 U23.B6 | length 167.5
  Top Layer w3: U23.B6@5736.22,1007.87 5745.72,998.37 5745.72,970
  Top Layer w4.7: C166.2@5740.16,858.08 5759.54,877.46 5759.54,941.37 5745.72,955.19 5745.72,970
NetC167_2: C167.2 U23.A6 | length 124
  Top Layer w4.7: U23.A6@5755.91,1007.87 5776.7,1007.87 5820,964.57 C167.2@5862.02,964.57
NetC168_2: C168.2 U23.A7 | length 103.4
  Top Layer w4.7: U23.A7@5755.91,988.18 5755.91,965.67 5787.4,934.18 C168.2@5787.4,897.83
NetC169_2: C169.2 U23.C5 | length 157.8
  Top Layer w3: 5706.35,970 5706.35,1017.36 U23.C5@5716.54,1027.55 U23.C5@5717.45,1027.55
  Top Layer w4.7: C169.2@5679.97,889.76 C169.2@5677.17,889.76 5677.17,902.17 5693.65,918.65 5693.65,957.3 5706.35,970
NetC171_1: C171.1 J7.5 L30.2 | length 220.2
  Top Layer w20: J7.5@122.05,3456.69 197.99,3456.69 241.3,3413.39 245,3417.09 v2(245,3455)
  Bottom Layer w20: v2(245,3455) C171.1@245,3494.87
NetC175_2: C175.2 R126.2 U25.6 | length 184.8
  Top Layer w4.7: v2(1275,1735) 1275,1750.91 1287.87,1763.78 U25.6@1319.14,1763.78 1350.68,1763.78 1370.17,1744.28 R126.2@1389.76,1744.28
  Bottom Layer w4.7: C175.2@1240.35,1720.47 1260.47,1720.47 v2(1275,1735)
NetC179_1: C179.1 R129.1 | length 47.2
  Bottom Layer w4.7: R129.1@1555.12,1979.87 C179.1@1602.36,1979.87
NetC180_1: C180.1 J9.1 | length 137.5
  Top Layer w4.7: J9.1@1370.08,1885.83 1370.08,1979.91 v2(1370.17,1980)
  Bottom Layer w4.7: v2(1370.17,1980) 1413.26,1980 C180.1@1413.39,1979.87
NetC180_2: C180.2 R129.2 R130.2 | length 237.6
  Bottom Layer w4.7: C180.2@1413.39,2019.87 1413.39,2063.39 1425,2075 1495,2075 1507.87,2062.13 R130.2@1507.87,2019.87 R129.2@1555.12,2019.87
NetC184_1: C184.1 J9.3 | length 130.6
  Top Layer w4.7: J9.3@1401.57,1885.83 1401.57,1941.46 v2(1405,1944.88)
  Bottom Layer w4.7: v2(1405,1944.88) 1405.12,1945 1425.76,1945 C184.1@1460.63,1979.87
NetC185_2: C185.2 R134.2 U26.6 | length 250.1
  Top Layer w4.7: C185.2@7035.55,3173.04 7170.35,3173.04 7181.22,3162.16 U26.6@7181.22,3133.86 7181.22,3103.27 7193.03,3091.46 R134.2@7193.03,3067.12
NetC193_1: C193.1 R142.2 R143.1 R144.1 | length 532.1
  Top Layer w10: R143.1@6110,669.87 6094.87,669.87 6070,645 6070,540 6089.87,520.13 C193.1@6110,520.13 6134.87,520.13 6160,495 R144.1@6195,495 v5(6195,540) ; R142.2@6335,491.89 v5(6335,540)
  Bottom Layer w10: v5(6195,540) v5(6335,540)
NetC195_1: C195.1 U30.1 | length 310.2
  Top Layer w4.7: v2(7045,595) 7113.66,595 U30.1@7114.17,594.49 v2(7174.68,594.49)
  Bottom Layer w4.7: v2(7045,595) 7030.55,595 7010,615.55 7010,675 7031.85,696.85 C195.1@7078.3,696.85
NetC195_2: C195.2 U30.3 | length 117.9
  Top Layer w4.7: U30.3@7114.17,694.49 7172.32,694.49 v2(7174.68,696.85)
  Bottom Layer w4.7: C195.2@7118.3,696.85 v2(7174.68,696.85)
NetC196_1: C196.1 U30.2 | length 117.1
  Top Layer w4.7: U30.2@7114.17,644.49 7115.35,645.67 v2(7174.68,645.67)
  Bottom Layer w4.7: C196.1@7118.55,645.67 v2(7174.68,645.67)
NetC197_1: C197.1 U30.6 | length 118.5
  Top Layer w4.7: U30.6@7114.17,844.49 7173.23,844.49 v2(7175.2,846.46)
  Bottom Layer w4.7: C197.1@7118.55,846.46 v2(7175.2,846.46)
NetC198_1: C198.1 U30.4 | length 146.1
  Top Layer w4.7: v2(7045,794.49) 7045,755.91 7056.81,744.09 7113.78,744.09 U30.4@7114.17,744.49
  Bottom Layer w4.7: v2(7045,794.49) C198.1@7078.3,794.49
NetC198_2: C198.2 U30.5 | length 118.3
  Top Layer w4.7: U30.5@7114.17,794.49 7114.69,795 v2(7175.2,795)
  Bottom Layer w4.7: C198.2@7118.3,794.49 7174.68,794.49 v2(7175.2,795)
NetC203_1: C203.1 Q10.2 R152.1 R153.1 | length 205.6
  Bottom Layer w10: R153.1@6850.83,-15.75 6850.39,-15.31 Q10.2@6850.39,43.31 6923.5,43.31 6925.2,45 ; C203.1@6925.2,11.81 6925.2,45 ; R152.1@6925.2,82.68 6925.2,45
NetC204_1: C204.1 D36.2 J13.11 U33.2 | length 568.6
  Top Layer w15: J13.11@7078.74,360.24 7078.74,453.74 7170,545 7310.39,545 7362.65,597.25 C204.1@7362.65,657.48 7362.65,726.72 U33.2@7361.02,728.35
NetC205_1: C205.1 D38.2 J13.13 U34.2 | length 597.1
  Top Layer w15: J13.13@7196.85,360.24 7196.85,451.85 7255,510 7340,510 7415,585 7489.06,585 7524.06,620 C205.1@7524.06,657.48 7524.06,727.71 U34.2@7523.43,728.35
NetC206_1: C206.1 Q11.2 R157.1 R158.1 | length 330.1
  Bottom Layer w10: R157.1@7350.39,82.68 C206.1@7350.39,11.81 7410.84,-48.64 7486.8,-48.64 7500.44,-35 R158.1@7500.44,-15.75 7500.44,42.87 Q11.2@7500,43.31
NetC207_1: C207.1 D40.2 J13.15 U35.2 | length 624.2
  Top Layer w15: J13.15@7314.96,360.24 7314.96,419.96 7445,550 7620,550 7685.48,615.48 C207.1@7685.48,657.48 7685.48,728 U35.2@7685.83,728.35
NetC208_1: C208.1 D42.2 Q12.2 R162.1 R163.1 | length 329.8
  Bottom Layer w15: R162.1@755.91,346.46 814.96,346.46 C208.1@842.52,374.02 ; R163.1@859.87,500 859.87,391.37 C208.1@842.52,374.02 ; Q12.2@909.45,303.15 909.45,307.09 C208.1@842.52,374.02
NetC209_1: C209.1 D43.2 J13.17 U36.2 | length 691.6
  Top Layer w15: J13.17@7433.07,360.24 7433.07,438.07 7510,515 7765,515 7850.83,600.83 C209.1@7850.83,657.48 7850.83,725.74 U36.2@7848.23,728.35
NetC210_1: C210.1 D45.2 J13.19 U38.2 | length 732.6
  Top Layer w15: J13.19@7551.18,360.24 7551.18,436.18 7595,480 7890,480 8012.25,602.25 C210.1@8012.25,657.48 8012.25,726.72 U38.2@8010.63,728.35
NetD1_1: D1.1 L1.3
NetD2_2: D2.2 Q1.1 Q2.1 R3.2
NetD3_1: D3.1 R2.1
NetD4_2: D4.2 R6.2 | length 202.7
  Bottom Layer w15: R6.2@598.43,47.24 646.85,47.24 675,75.39 675,106.1 D4.2@734.25,165.35
NetD8_2: D8.2 R16.1 U7.5 | length 172.4
  Top Layer w15: U7.5@1332.28,575.2 1332.28,587.28 1359.17,614.17 1379.17,614.17 1394.87,629.87 R16.1@1394.87,710
NetD11_2: D11.2 R21.1 U9.5 | length 170.3
  Top Layer w15: U9.5@1332.28,1429.53 1332.28,1446.46 1354.33,1468.5 1374.02,1468.5 1393.26,1487.75 R21.1@1393.26,1562.99
NetD12_2: D12.2 R22.1 U10.5 | length 179.4
  Top Layer w15: U10.5@2351.97,575.2 2351.97,588.89 2373.76,610.68 2405.44,610.68 2414.87,620.11 R22.1@2414.87,710
NetD13_2: D13.2 D14.2 R43.1 | length 151.6
  Top Layer w4.7: R43.1@3399.87,605 3399.87,754.2 D13.2@3401.57,755.91
NetD17_2: D17.2 Q6.2 R58.2 | length 143.2
  Top Layer w10: D17.2@7718.15,2490 R58.2@7785.13,2490 7785.13,2465.13 7770,2450 Q6.2@7770,2420
NetD18_1: D18.1 Q7.2 R59.2 | length 143.1
  Top Layer w10: D18.1@7700,2786.85 Q7.2@7700,2710 7720,2710 7735.13,2694.87 R59.2@7760,2694.87
NetD19_2: D19.2 L9.2 R60.2 U15.5
NetD20_1: D20.1 L10.2 U18.3
NetD31_1: D31.1 R131.2 | length 69.4
  Top Layer w10: R131.2@2470,2089.87 2490.13,2089.87 D31.1@2525,2055
NetD34_1: D34.1 D35.2 J13.12 | length 248.8
  Top Layer w20: J13.12@7078.74,178.35 7078.74,136.81 7120,95.55 v2(7120,70)
  Bottom Layer w10: D34.1@7000,187.01 7000,159.45 7065,94.45 7065,90.55
  other v2: 7120,90
NetD34_2: D34.2 R152.2 | length 125.1
  Bottom Layer w10: R152.2@6925.2,153.54 6961.46,153.54 7000,115 D34.2@7000,80.71